# EAGLE board RFM70 (EAGLE 7.2.0)
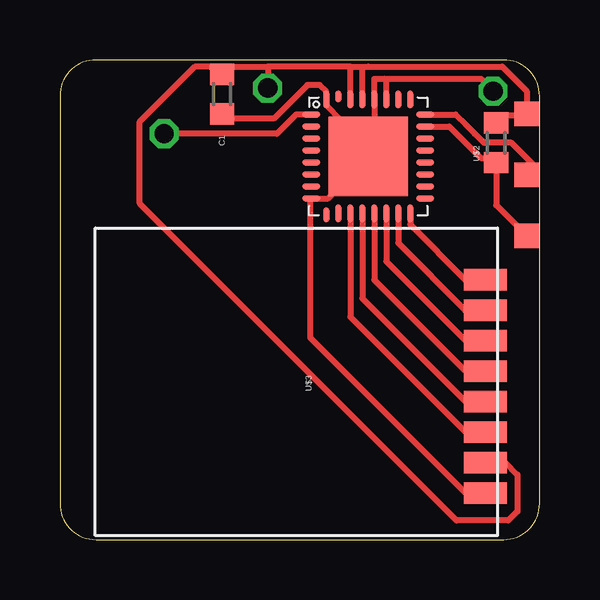
[diagram p0: board, top side]
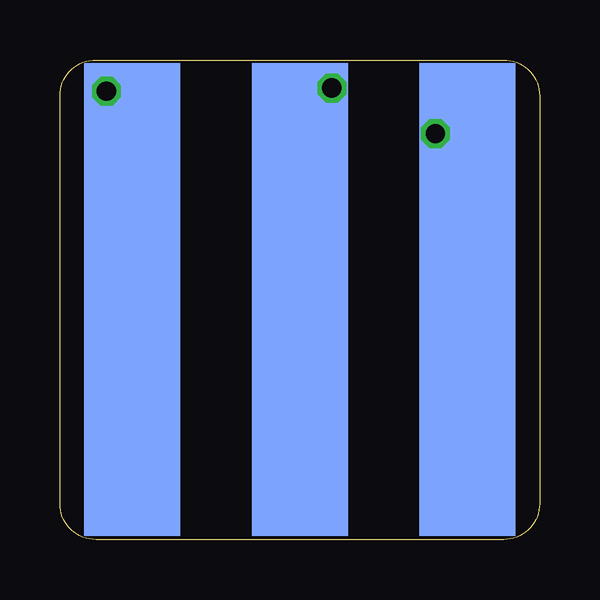
[diagram p1: board, bottom side, seen from below]

Size 20 x 20 mm. Coordinates in mm from the lower left corner, seen from the top.
Copper layers (1*16): Top 0.035mm / dielectric 1.5mm / Bottom 0.035mm
Design rules "Bilex DRU *": minimum track width 10mil, minimum drill 24mil, track to track 10mil, track to pad 10mil, pad to pad 10mil, via to via 10mil, smd to smd 10mil, copper to edge 1mil, drill to drill 8mil, minimum pad ring 10mil, minimum via ring 8mil, stop-mask expansion 4mil, vias tented up to drill 0mil, thermal gap 10mil

## Footprints (pad centres in the part's own frame; a part is rotated, then mirrored left to right if it is on the bottom)
603 = smd 0.889 x 1.016: 1 -0.826,0; 2 0.826,0
CARRIER_SMD2_WIDE_3POL = smd 4 x 19.7 bottom: GND -6.985,3.493; RX/TX 6.985,3.493; VCC 0,3.493 | smd 1.016 x 1.016: RST -9.461,0.826; TST -9.461,-1.714; VCC'' -9.461,-4.255
RFM70_SMD = smd 0.9 x 1.8: CE -2.032,-7.112; CSN -0.762,-7.112; GND -4.572,-7.112; IRQ 4.318,-7.112; MISO 3.048,-7.112; MOSI 1.778,-7.112; SCK 0.508,-7.112; VDD -3.302,-7.112
QFN32 = smd 0.762 x 0.254: 1 -2.375,1.75; 2 -2.375,1.25; 3 -2.375,0.75; 4 -2.375,0.25; 5 -2.375,-0.25; 6 -2.375,-0.75; 7 -2.375,-1.25; 8 -2.375,-1.75; 17 2.375,-1.75; 18 2.375,-1.25; 19 2.375,-0.75; 20 2.375,-0.25; 21 2.375,0.25; 22 2.375,0.75; 23 2.375,1.25; 24 2.375,1.75 | smd 0.254 x 0.635: 9 -1.75,-2.438 | smd 0.254 x 0.762: 10 -1.25,-2.375; 11 -0.75,-2.375; 12 -0.25,-2.375; 13 0.25,-2.375; 14 0.75,-2.375; 15 1.25,-2.375; 16 1.75,-2.375; 25 1.75,2.375; 26 1.25,2.375; 27 0.75,2.375; 28 0.25,2.375; 29 -0.25,2.375; 30 -0.75,2.375; 32 -1.75,2.375 | smd 0.254 x 0.508: 31 -1.25,2.5 | smd 3.302 x 3.302: TP 0,0

## Placement (x,y rotation side)
C1  100n  [603]  6.76,18.57 270 top
U$1  CARRIER_SMD2SMD2_3POL_W  [CARRIER_SMD2_WIDE_3POL]  10,13.5 180 top
U$2  10k  [603]  18.19,16.55 90 top
U$3  RFM702  [RFM70_SMD]  10.62,6.51 90 top
U$10  MSP430G2553  [QFN32]  12.86,15.98 0 top

## Library data of the parts
C1 U$1-U$3 U$10 = thar

## Nets
GND: C1.2 U$1.GND U$3.GND U$10.8 U$10.27 U$10.28 U$10.32 U$10.TP
N$2: U$3.IRQ U$10.16
N$3: U$1.TST U$10.24
N$4: U$1.RST U$2.1 U$10.23
N$5: U$3.MISO U$10.15
N$6: U$3.MOSI U$10.14
N$7: U$3.SCK U$10.13
N$11: U$3.CSN U$10.12
N$12: U$1.RX/TX U$10.1
N$13: U$3.CE U$10.11
VCC: C1.1 U$1.VCC U$1.VCC'' U$2.2 U$3.VDD U$10.29 U$10.30

## Tracks (layer width: path | path; a pad name or v marks a point on that pad's centre or on a via)
GND  (via drill 0.8)
  Top 0.254: 13.38,15.66 12.88,16.69 13.12,16.67 | 13.38,15.66 13.43,15.63 U$10.TP 12.47,15.77 12.35,15.72 12.09,15.14 11.17,14.23 U$10.8 10.44,14.19 10.44,8.41 16.91,1.94 U$3.GND | 13.11,17.05 U$10.28 13.11,19.21 13.5,19.21 | 13.11,17.05 13.11,16.37 13.38,15.66 | 13.11,17.05 12.34,17.31 11.71,17.5 11.11,18.11 U$10.32 11.11,18.67 10.82,18.95 10.31,18.95 8.92,17.56 6.95,17.56 C1.2 | v18.06,18.7 17.55,19.21 13.5,19.21 | U$10.27 13.61,19.19 13.5,19.21
  Bottom 0.254: U$1.GND 18,18.26 v18.06,18.7
N$2
  Top 0.254: U$3.IRQ 16.91,10.83 14.61,13.14 U$10.16
N$3
  Top 0.254: U$1.TST 19.71,15.65 18.82,16.55 17.68,16.55 17.3,16.93 16.92,17.3 16.5,17.73 U$10.24
N$4
  Top 0.254: U$2.1 18.19,13.95 U$1.RST | 18.06,15.66 17.87,15.78 U$2.1 | U$10.23 16.24,17.23 17.55,15.91 18.26,15.91 U$2.1
N$5
  Top 0.254: U$3.MISO 16.91,9.56 14.11,12.37 U$10.15
N$6
  Top 0.254: U$3.MOSI 16.91,8.29 13.61,11.6 U$10.14
N$7
  Top 0.254: U$3.SCK 16.91,7.02 13.11,10.83 U$10.13
N$11
  Top 0.254: U$3.CSN 16.91,5.75 12.61,10.06 U$10.12
N$12  (via drill 0.8)
  Top 0.254: U$10.1 9.85,17.73 9.04,16.92 4.47,16.92 v4.35,16.93
  Bottom 0.254: v4.35,16.93 3.91,15.22 | 3.91,15.22 3.71,14.45 | U$1.RX/TX 3.01,14.33 3.91,15.22
N$13
  Top 0.254: U$10.11 12.11,9.29 16.91,4.48 U$3.CE
VCC  (via drill 0.8)
  Top 0.254: U$10.30 12.11,19.72 | 12.11,19.72 12.86,19.72 | 12.86,19.72 18.44,19.72 19.46,18.7 U$1.VCC'' | 12.11,19.72 8.67,19.72 | 6.63,19.72 8.67,19.72 | 8.67,19.72 v8.66,18.83 | U$1.VCC'' 19.65,17.75 19.71,17.82 | U$2.2 18.06,17.43 18.19,17.69 19.27,17.69 U$1.VCC'' | U$10.29 12.61,19.72 12.86,19.72 | U$3.VDD 18.57,3.21 19.08,2.7 19.08,1.17 18.7,0.79 16.54,0.79 3.33,14 3.33,17.43 5.62,19.72 6.25,19.72 6.63,19.72 | C1.1 6.82,19.66 6.63,19.72
  Bottom 0.254: U$1.VCC 10,17.5 v8.66,18.83